# Altium PCB slave board_PCB.PcbDoc
Units mil, origin at the board's own origin, x right, y up, seen from the top; angles counter-clockwise.
Board outline 6000 x 4000 mil, 2 copper layers (Top Layer, Bottom Layer); 8 components, 8 nets, 30 pads, 0 vias.
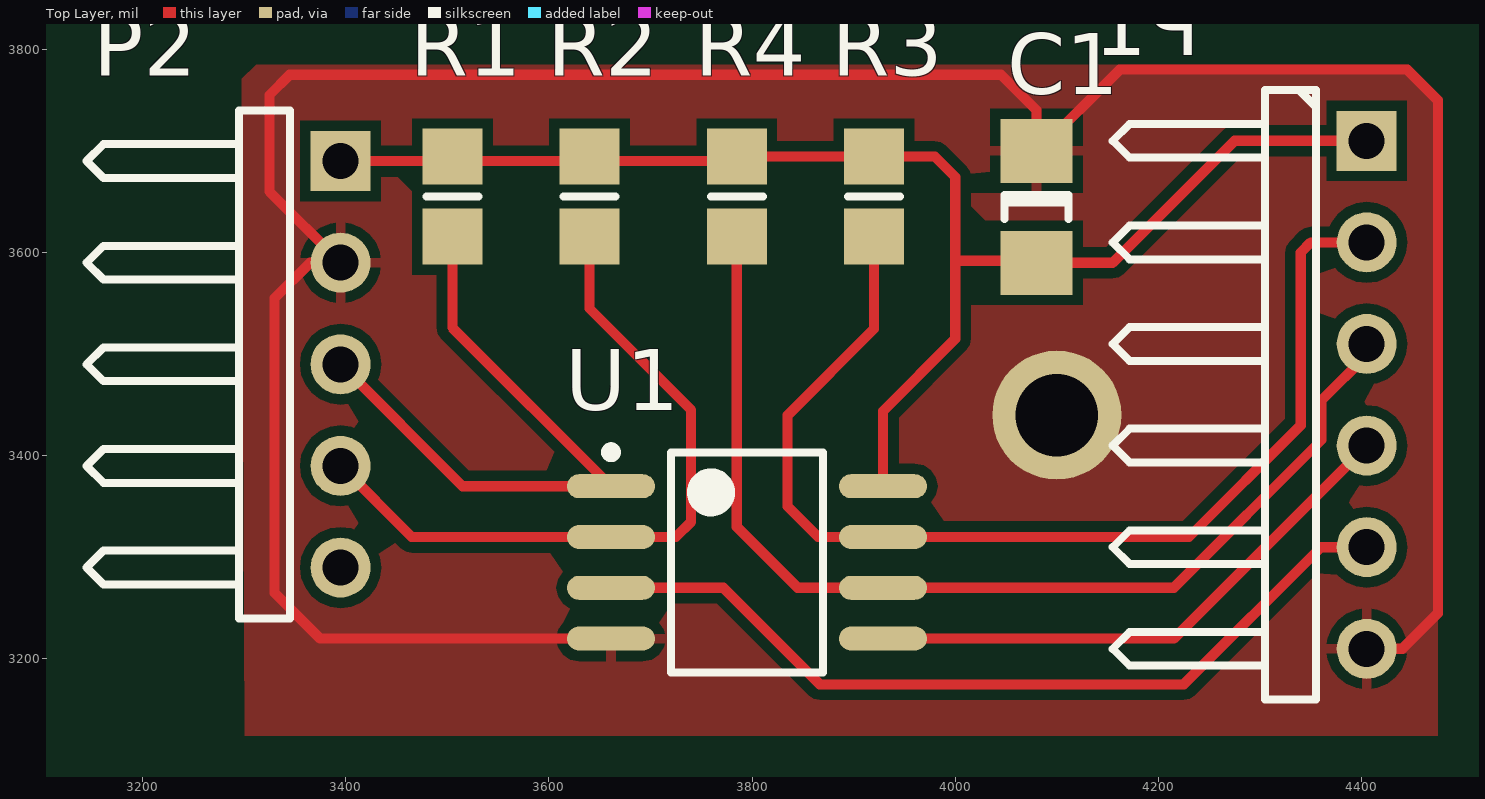
[diagram p0: Top Layer view]
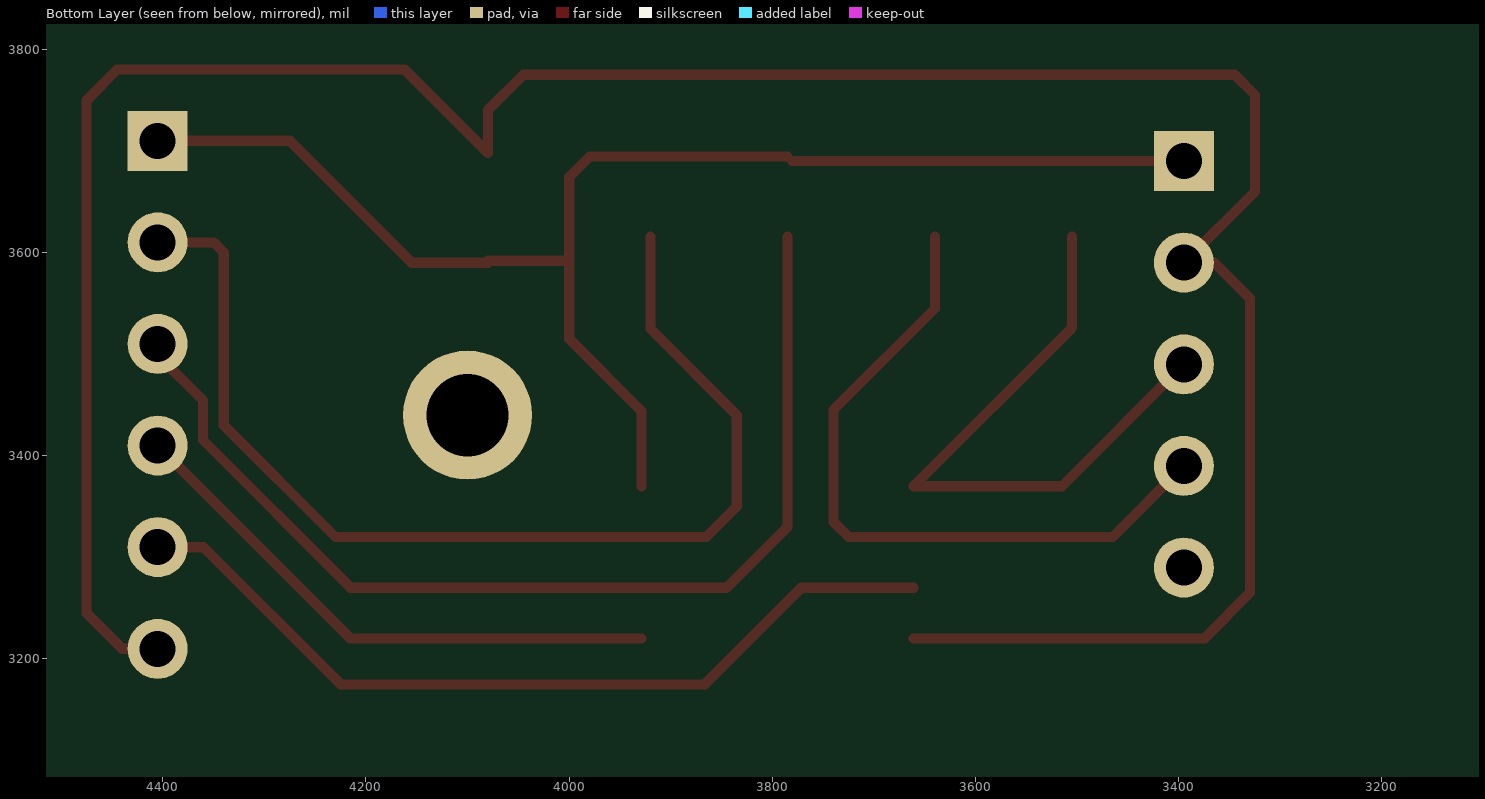
[diagram p1: Bottom Layer view, seen from below]

## Layer stack, top to bottom
Top Layer: signal copper 1.4
Dielectric: dielectric 12.6, FR-4, Dk 4.8
Bottom Layer: signal copper 1.4

## Board outline
1000,1000 7000,1000 7000,5000 1000,5000

## Design rules (kind name [scope] priority, off if disabled: settings)
Clearance [All] p1: gap=10
PolygonConnect [All] p1: connectstyle=Relief reliefconductorwidth=10 reliefentries=4 polygonreliefangle="90 Angle" airgapwidth=10
RoomDefinition "slave board_CHM" [InComponentClass('slave board_CHM')] p1: confinementstyle=ConfineIn formatcopy=TRUE lockcomponents=FALSE outline 3125,3020 4585,3020 4585,3930 3125,3930
RoutingVias [All] p1: holewidth=28 width=50 viastyle="Through Hole" minholewidth=28 minwidth=50 maxholewidth=28 maxwidth=50
SilkscreenOverComponentPads [All] p1: minsilkscreentomaskgap=10
SolderMaskExpansion [All] p1: expansion=4
Width [All] p1: maxlimit=10 minlimit=10 preferedwidth=10
27 further rules are at their usual default settings.

## Components (designator, comment, footprint, x,y, rotation, side; value= is the part's Value field where it differs from the comment)
C1 "C1206" 1206 4080,3645 r270 top
P1 "Header 6H" HDR1X6H 4405,3710 r270 top
P2 "Header 5H" HDR1X5H 3395,3690 r270 top
R1 "Res2" 6-0805_M 3505,3655 r90 top
R2 "Res2" 6-0805_M 3640,3655 r90 top
R3 "Res2" 6-0805_M 3920,3655 r90 top
R4 "Res2" 6-0805_M 3785,3655 r90 top
U1 "ATtiny25-15SZ" T5_N 3795,3295 r0 top

## Footprints (in the part's own frame and the unit in brackets; to place one, negate y for a bottom-side part, rotate by r counter-clockwise, add the part's x,y. Pads: shape width x height; smd on the part's side, far side on the other; paste and mask are expansions set on the pad)
6-0805_M [mm] "Chip Resistor, Body 2.0x1.2mm, IPC Low Density"
  rect 1.4x1.5 smd: 1(-1,0) 2(1,0)
  silkscreen extent 0,-0.65 0,0.65, body extent -1.07,-0.7 1.07,0.7, height 0.7
1206 [mm] "Chip Capacitor; Body 3.2 x 1.6 mm (LxW typ)"
  rect 1.6x1.8 smd: 1(-1.4,0) 2(1.4,0)
  silkscreen extent -0.3,-0.8 0.3,0.8
HDR1X5H [mm] "Connector; Header; 5 Position; Right Angle"
  rect 1.5x1.5 hole 0.9: 1(0,0)
  round 1.5 hole 0.9: 2(2.54,0) 3(5.08,0) 4(7.62,0) 5(10.16,0)
  silkscreen extent -1.27,-6.35 11.43,-1.27
HDR1X6H [mm] "Connector; Header; 6 Position; Right Angle"
  rect 1.5x1.5 hole 0.9: 1(0,0)
  round 1.5 hole 0.9: 2(2.54,0) 3(5.08,0) 4(7.62,0) 5(10.16,0) 6(12.7,0)
  silkscreen extent -1.27,-6.35 13.97,-1.27
T5_N [mm] "SOP, 8-Leads, Body 5.2x5.3mm, Pitch 1.27mm, IPC Medium Density"
  oval 2.2x0.6 smd: 1(-3.4,1.905) 2(-3.4,0.635) 3(-3.4,-0.635) 4(-3.4,-1.905) 5(3.4,-1.905) 6(3.4,-0.635) 7(3.4,0.635) 8(3.4,1.905)
  silkscreen extent -3.52,-2.75 1.9,2.88, body extent -2.73,-2.75 2.73,2.75, height 2.16

## Part data
C1: "Ceramic Chip Capacitor - Standard"
P1: "Header, 6-Pin, Right Angle"
P2: "Header, 5-Pin, Right Angle"
R1 R2 R3 R4: "Resistor"
U1: "8-bit Automotive AVR Microcontroller, 2KB Flash, 128 Bytes EEPROM, 128 Bytes SRAM, Automotive Grade (-40°C to +125°C), 8-Pin SOIC"

## Free pads (board coordinates)
  round 127 hole 81: 0(4100,3440)

## Nets (pads, with @x,y where several pads share a name; then routed paths per layer and width w, separated by ;. In a path a pad name is that pad's centre, name@x,y a point inside that pad or via, vN(x,y) a via of type N, cw(c..) or ccw(c..) an arc to the next point about the centre after c; other vN are vias at no path point)
GND: C1.1 P1.6 P2.2 pad.0 U1.4 | length 2733.7
  Top Layer w10: 3365,3590 3330,3555 3330,3265 3375,3220 U1.4 ; P2.2 3325,3660 3325,3755 3345,3775 4045,3775 4080,3740 C1.1 4080,3698.15 4161.85,3780 4445,3780 4475,3750 4475,3245 4440,3210 P1.6
NetP1_2: P1.2 R3.1 U1.7 | length 1103
  Top Layer w10: R3.1 3920,3525 3835,3440 3835,3350 3865,3320 U1.7 4230,3320 4340,3430 4340,3600 4350,3610 P1.2
NetP1_3: P1.3 R4.1 U1.6 | length 1048.2
  Top Layer w10: R4.1 3785,3330 3845,3270 U1.6 4215,3270 4360.47,3415.47 4360.47,3454.53 P1.3@4405,3499.06
NetP1_4: P1.4 U1.5 | length 554.8
  Top Layer w10: U1.5 4215,3220 P1.4
NetP1_5: P1.5 U1.3 | length 839.1
  Top Layer w10: U1.3 3771.63,3270 3866.63,3175 4225,3175 4360,3310 P1.5
NetP2_3: P2.3 R1.1 U1.1 | length 626.2
  Top Layer w10: P2.3 3515,3370 U1.1 3505,3526.14 R1.1
NetP2_4: P2.4 R2.1 U1.2 | length 702.3
  Top Layer w10: P2.4 3465,3320 U1.2 3725,3320 3740,3335 3740,3445 3640,3545 R2.1
VCC: C1.2 P1.1 P2.1 R1.2 R2.2 R3.2 R4.2 U1.8 | length 1394.7
  Top Layer w10: P2.1 R4.2@3780.63,3690 ; R4.2 R3.2 3980,3694.37 4000,3674.37 4000,3515 3928.86,3443.86 U1.8 ; 4002.83,3591.85 C1.2@4080,3591.85 ; C1.2 4154.88,3589.88 4275,3710 P1.1
pads on no net: P2.5

## Polygon pours and split planes (outlines as drawn)
GND on Top Layer "Top Layer-No Net" (solid, remove dead copper, pour order 4): 3297.62,3785 4446.21,3785 4471.8,3749.3 4475,3744.84 4475,3124.53 3300.82,3124.53